# Altium PCB esp32c3phils.PcbDoc (part 2 of 2)
Units mil, origin at the board's own origin, x right, y up, seen from the top; angles counter-clockwise.
Board outline 2756.04 x 1955.51 mil, 2 copper layers (Top Layer, Bottom Layer), stack 37.8 mil thick; 62 components, 45 nets, 255 pads, 20 vias.
Unrouted connection lines stored in the file: 112.
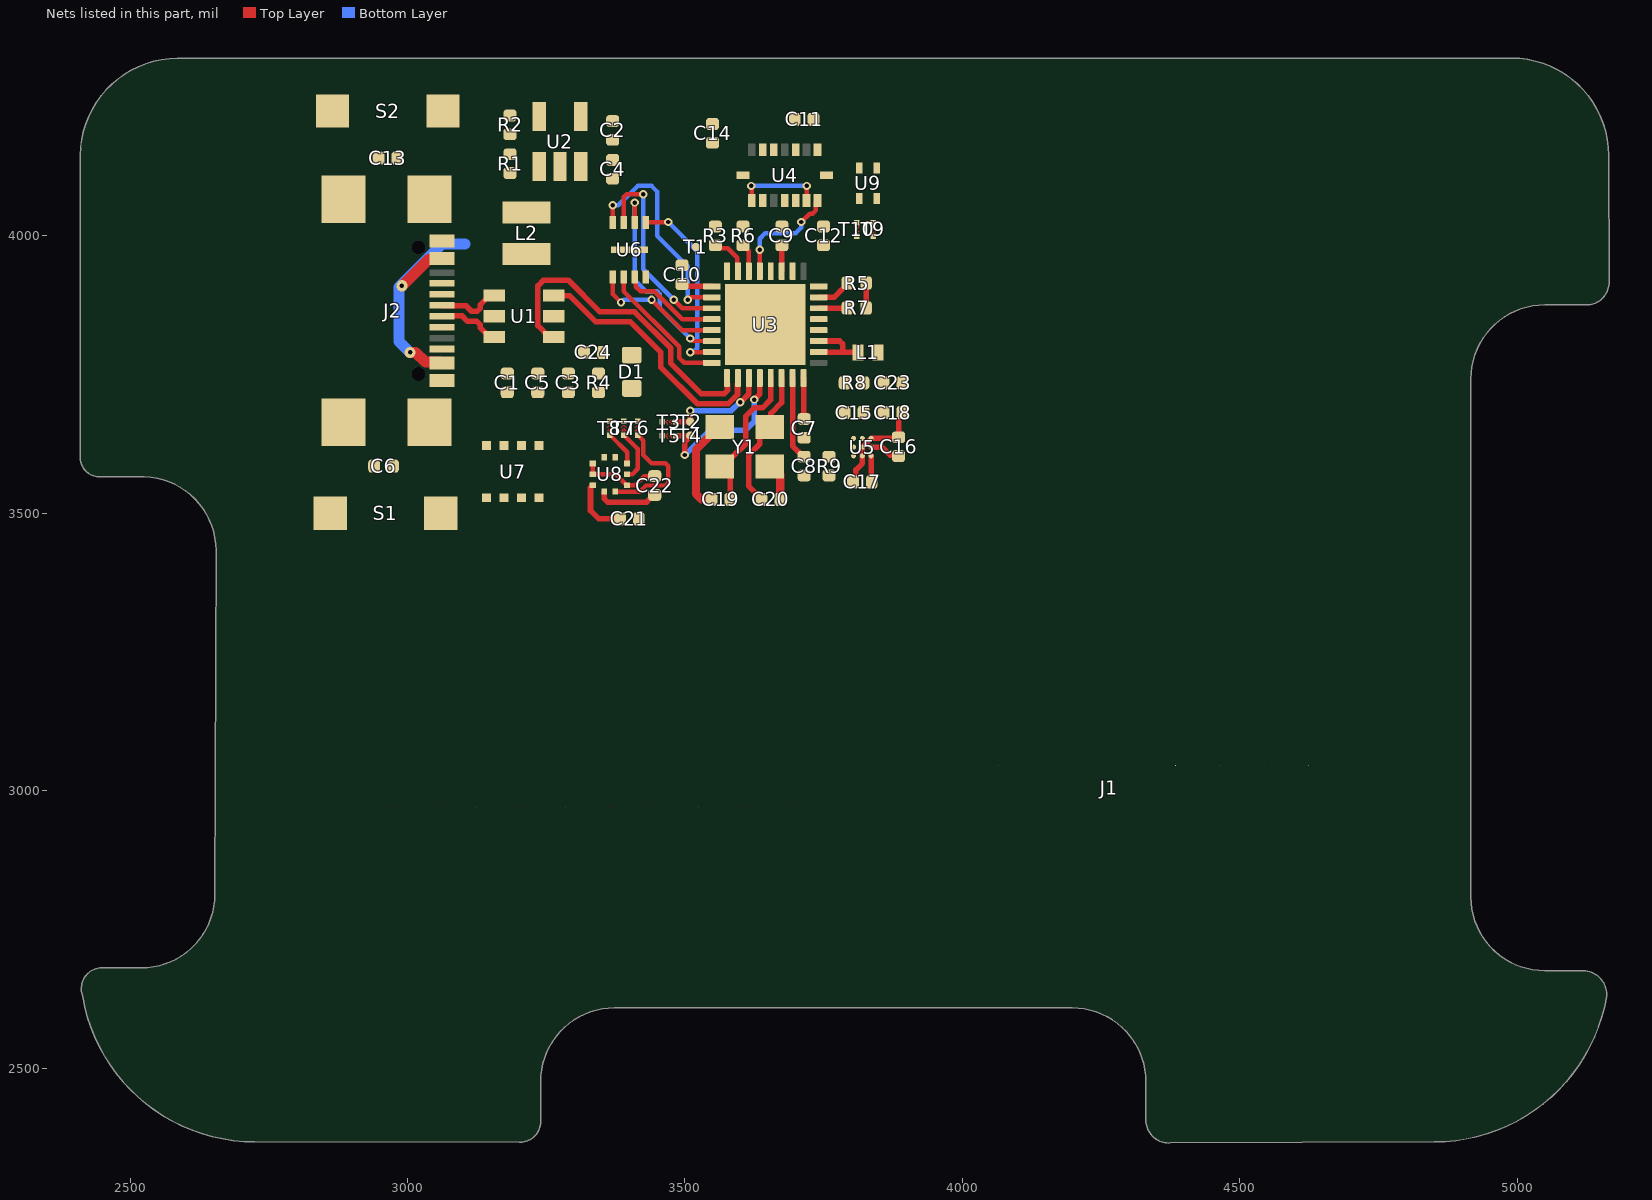
[diagram p2: the nets of this part, all layers, seen from the top]

## Part data
C1 C2 C4 C6 C7 C8 C9 C10 C11 C12 C13 C15 C17 C18 C21 C22: library part CC0402KRX7R7BB104, "Multilayer Ceramic Capacitor, 0.1 uF, 16 V, ï¿½ 10%, X7R, 0402 [1005 Metric]", Capacitance=100nF, Case Code (Imperial)=0402, Case Code (Metric)=1005, Dielectric=X7R, LCSC=C60474, Manufacturer=Yageo, Max Operating Temperature=125°C, Min Operating Temperature=-55°C, Package Quantity=1, Supplier Part Number 1=311-1338-1-ND, Temperature Coefficient=30ppm/°C, Tolerance=10%, Voltage=16V, Case/Package=0402, Category="Ceramic Capacitors", ComponentLink1Description=https://datasheet.ciiva.com/11788/0900766b80ce67ed-11788364.pdf?src-supplier=Rs, ComponentLink1URL=https://datasheet.ciiva.com/11788/0900766b80ce67ed-11788364.pdf?src-supplier=Rs, ComponentLink2Description=https://datasheet.ciiva.com/7978/1489800-7978111.pdf?src-supplier=Element14, ComponentLink2URL=https://datasheet.ciiva.com/7978/1489800-7978111.pdf?src-supplier=Element14, ComponentLink3Description=https://datasheet.ciiva.com/161/mlccorderingcode-161545.pdf?src-supplier=Digikey, ComponentLink3URL=https://datasheet.ciiva.com/161/mlccorderingcode-161545.pdf?src-supplier=Digikey, ComponentLink4Description=https://datasheet.ciiva.com/161/mlccorderingcode-161544.pdf?src-supplier=Digikey, ComponentLink4URL=https://datasheet.ciiva.com/161/mlccorderingcode-161544.pdf?src-supplier=Digikey, ComponentLink5Description=https://datasheet.ciiva.com/161/mlccorderingcode-161546.pdf?src-supplier=Digikey, ComponentLink5URL=https://datasheet.ciiva.com/161/mlccorderingcode-161546.pdf?src-supplier=Digikey, ComponentLink6Description=https://datasheet.ciiva.com/8033/1734573-8033661.pdf?src-supplier=Element14, ComponentLink6URL=https://datasheet.ciiva.com/8033/1734573-8033661.pdf?src-supplier=Element14, ComponentLink7Description=https://datasheet.ciiva.com/11587/upy-gphc-x7r-6-3v-to-50v-8-11587305.pdf?src-supplier=Avnet, ComponentLink7URL=https://datasheet.ciiva.com/11587/upy-gphc-x7r-6-3v-to-50v-8-11587305.pdf?src-supplier=Avnet, Depth=0.5mm, Halogen Free=5694HalogenFree, Height=0.5mm, Lead Free=5697LeadFree, Length=1mm, Manufacturer Part Number=CC0402KRX7R7BB104, Material=4241ConductorMaterial, Mount="Surface Mount", Number of Pins=2, Packaging="Tape and Reel", Pricing 1="1=0.1, 10=0.024, 50=0.0164, 100=0.0139, 500=0.0098, 1000=0.00852, 2500=0.00718, 5000=0.00636 (USD)", Radiation Hardening=No, Reach SVHC Compliant=No, RoHS=Yes, RoHS Compliant=Yes, Series=CC, Stock 1=15609894, Supplier 1=Digikey, Termination=SMD/SMT, Thickness=0.022inch, Voltage Rating=16V, Voltage Rating (AC)=16V, Voltage Rating (DC)=16V, Width=0.02inch
C3 C5 C23 C24: library part 0402ZD106MAT2A, "Multilayer Ceramic Chip Capacitor 0402 Size 10uF 10V X5R ±20% Tolerance SMD T/R", Capacitance=10uF, Case Code (Imperial)=0402, Case Code (Metric)=1005, Dielectric=X5R, Manufacturer="Kyocera AVX", Max Operating Temperature=85°C, Min Operating Temperature=-55°C, Supplier Part Number 1=478-KGM05CR51A106MHCT-ND, Tolerance=20%, Voltage Rating=10V, Case/Package=0402, Category="Ceramic Capacitors", ComponentLink1Description=http://catalogs.avx.com/SurfaceMount.pdf?src-supplier=Digikey, ComponentLink1URL=http://catalogs.avx.com/SurfaceMount.pdf?src-supplier=Digikey, ComponentLink2Description=http://datasheets.avx.com/cx5r.pdf?src-supplier=Digikey, ComponentLink2URL=http://datasheets.avx.com/cx5r.pdf?src-supplier=Digikey, ComponentLink3Description=https://datasheet.octopart.com/0402ZD106MAT2A-KYOCERA-AVX-datasheet-155912759.pdf?src-supplier=Future+Electronics, ComponentLink3URL=https://datasheet.octopart.com/0402ZD106MAT2A-KYOCERA-AVX-datasheet-155912759.pdf?src-supplier=Future+Electronics, ComponentLink4Description=https://www.farnell.com/datasheets/2260752.pdf?src-supplier=Newark, ComponentLink4URL=https://www.farnell.com/datasheets/2260752.pdf?src-supplier=Newark, ComponentLink5Description=https://datasheet.octopart.com/0402ZD106MAT2A-KYOCERA-AVX-datasheet-155912759.pdf?src-supplier=TME, ComponentLink5URL=https://datasheet.octopart.com/0402ZD106MAT2A-KYOCERA-AVX-datasheet-155912759.pdf?src-supplier=TME, Height=710um, Manufacturer Part Number=0402ZD106MAT2A, Material=4241ConductorMaterial, Mount="Surface Mount", Packaging="Cut Tape", Pricing 1="1=0.36, 10=0.212, 100=0.1271, 1000=0.0834, 2500=0.07583 (USD)", RoHS=Yes, RoHS Compliant=Yes, Series=-, Stock 1=61749, Supplier 1=Digikey, Voltage Rating (DC)=10V
C14: library part CL05A106MQ5NUNC, "Multilayer Ceramic Capacitor, 10 uF, 6.3 V, ï¿½ 20%, X5R, 0402 [1005 Metric]", Capacitance=10uF, Case Code (Imperial)=0402, Case Code (Metric)=1005, Dielectric=X5R, Manufacturer=Samsung, Max Operating Temperature=85°C, Min Operating Temperature=-55°C, Package Quantity=1, Tolerance=20%, Voltage Rating=6.3V, Case/Package=0402, Category="Ceramic Capacitors", ComponentLink1Description=https://datasheet.ciiva.com/16437/cl05a106mq5nunc-16437356.pdf?src-supplier=Future+Electronics, ComponentLink1URL=https://datasheet.ciiva.com/16437/cl05a106mq5nunc-16437356.pdf?src-supplier=Future+Electronics, ComponentLink2Description=https://datasheet.ciiva.com/26877/getdatasheetpartid-355289-26877841.pdf?src-supplier=Verical, ComponentLink2URL=https://datasheet.ciiva.com/26877/getdatasheetpartid-355289-26877841.pdf?src-supplier=Verical, Construction=Flat, Depth=0.5mm, Height=0.5mm, Length=1mm, Manufacturer Part Number=CL05A106MQ5NUNC, Mount="Surface Mount", Packaging="Tape and Reel", Pricing 1="10000=0.02499, 20000=0.02486, 40000=0.02474, 60000=0.02461, 80000=0.02448 (USD)", Radiation Hardening=No, RoHS=Yes, RoHS Compliant=Yes, Series=CL, Stock 1=540000, Supplier 1=Avnet, Supplier Part Number 1=CL05A106MQ5NUNC, Thickness=0.028inch, Width=0.02inch
C16: "Multilayer Ceramic Capacitor, 2.2 uF, 6.3 V, ï¿½ 20%, X5R, 0402 [1005 Metric]", Capacitance=2.2uF, Case Code (Imperial)=0402, Case Code (Metric)=1005, Dielectric=X5R, Manufacturer=Samsung, Manufacturer Part Number=CL05A225MQ5NNNC, Max Operating Temperature=85°C, Min Operating Temperature=-55°C, Supplier Part Number 1=1276-1469-1-ND, Tolerance=20%, Voltage Rating=6.3V, Case/Package=0402, Category="Ceramic Capacitors", ComponentLink1Description=https://datasheet.ciiva.com/25798/cl05a225mq5nnnc-25798545.pdf?src-supplier=Digikey, ComponentLink1URL=https://datasheet.ciiva.com/25798/cl05a225mq5nnnc-25798545.pdf?src-supplier=Digikey, ComponentLink2Description=https://datasheet.ciiva.com/16437/cl05a225mq5nnnc-16437362.pdf?src-supplier=Future+Electronics, ComponentLink2URL=https://datasheet.ciiva.com/16437/cl05a225mq5nnnc-16437362.pdf?src-supplier=Future+Electronics, Construction=Flat, Depth=0.5mm, Height=0.5mm, Length=1mm, Material=Ceramic, Mount="Surface Mount", Packaging="Tape and Reel", Pricing 1="1=0.08, 10=0.011, 100=0.0064, 1000=0.0048, 2500=0.0032 (USD)", Radiation Hardening=No, RoHS=Yes, RoHS Compliant=Yes, Series=CL, Stock 1=23507, Supplier 1=Digikey, Voltage Rating (DC)=6.3V
C19 C20: library part C10, "0402 10 pF 50 V ±5 % Tolerance NP0 SMT Multilayer Ceramic Capacitor", Capacitance=10pF, Case Code (Imperial)=0402, Case Code (Metric)=1005, Dielectric=C0G, Dielectric Material=4241ConductorMaterial, Insulation Resistance=100GR, Manufacturer=Yageo, Manufacturer Part Number=CC0402JRNPO9BN100, Max Operating Temperature=125°C, Min Operating Temperature=-55°C, Package Quantity=1, Supplier Part Number 1=311-1014-1-ND, Temperature Coefficient=30ppm/°C, Tolerance=5%, Voltage=50V, Case/Package=0402, Category="Ceramic Capacitors", ComponentLink1Description=https://datasheet.ciiva.com/11786/0900766b8079c870-11786158.pdf?src-supplier=Rs, ComponentLink1URL=https://datasheet.ciiva.com/11786/0900766b8079c870-11786158.pdf?src-supplier=Rs, ComponentLink2Description=https://datasheet.ciiva.com/143/mlccorderingcode-143992.pdf?src-supplier=Digikey, ComponentLink2URL=https://datasheet.ciiva.com/143/mlccorderingcode-143992.pdf?src-supplier=Digikey, ComponentLink3Description=https://datasheet.ciiva.com/143/mlccorderingcode-143993.pdf?src-supplier=Digikey, ComponentLink3URL=https://datasheet.ciiva.com/143/mlccorderingcode-143993.pdf?src-supplier=Digikey, ComponentLink4Description=https://datasheet.ciiva.com/143/mlccorderingcode-143994.pdf?src-supplier=Digikey, ComponentLink4URL=https://datasheet.ciiva.com/143/mlccorderingcode-143994.pdf?src-supplier=Digikey, ComponentLink5Description=https://datasheet.ciiva.com/8033/1443161-8033591.pdf?src-supplier=Element14, ComponentLink5URL=https://datasheet.ciiva.com/8033/1443161-8033591.pdf?src-supplier=Element14, ComponentLink6Description=https://datasheet.ciiva.com/8033/1443161-8033593.pdf?src-supplier=Element14, ComponentLink6URL=https://datasheet.ciiva.com/8033/1443161-8033593.pdf?src-supplier=Element14, ComponentLink7Description=https://datasheet.ciiva.com/8033/1443161-8033596.pdf?src-supplier=Element14, ComponentLink7URL=https://datasheet.ciiva.com/8033/1443161-8033596.pdf?src-supplier=Element14, ComponentLink8Description=https://datasheet.ciiva.com/28450/1443161-28450213.pdf?src-supplier=Element14, ComponentLink8URL=https://datasheet.ciiva.com/28450/1443161-28450213.pdf?src-supplier=Element14, ComponentLink9Description=https://datasheet.ciiva.com/5427/upy-gp-np0-16v-to-50v-8-5427741.pdf?src-supplier=Mouser, ComponentLink9URL=https://datasheet.ciiva.com/5427/upy-gp-np0-16v-to-50v-8-5427741.pdf?src-supplier=Mouser, Depth=0.5mm, Halogen Free=5694HalogenFree, Height=0.5mm, Lead Free="Lead Free", Length=1mm, Mount="Surface Mount", Number of Pins=2, Packaging="Tape and Reel", Pricing 1="1=0.1, 10=0.024, 100=0.0133, 1000=0.00812, 2500=0.00685, 5000=0.00609 (USD)", Radiation Hardening=No, Reach SVHC Compliant=No, RoHS=Yes, RoHS Compliant=Yes, Series=CC, Stock 1=1109319, Supplier 1=Digikey, Termination=SMD/SMT, Thickness=0.022inch, Voltage Rating=50V, Voltage Rating (AC)=50V, Voltage Rating (DC)=50V, Width=0.02inch
D1: library part LED, "SMD LED Yellow-White", Package=None, Availability=Unavailable, MF=Chengguangxing, MP=ADL-0603W, Price=None, SnapEDA_Link=https://www.snapeda.com/parts/ADL-0603W/Chengguangxing/view-part/106378/?ref=snap
J1 J3: Package=None, Availability=Unavailable, MF="{'manufacturer': u'Adam Tech'}", MP=PH2-20-UA, Price=None
J2: library part USB4110-GF-A, "USB Connector, 16 Contact(s), Male, Right Angle, Surface Mount Terminal, Locking, Receptacle", Manufacturer="Global Connector Technology", Supplier Part Number 1=2073-USB4110-GF-A-1-ND, Voltage Rating=20V, Category="USB Connectors", ComponentLink1Description=https://gct.co/files/drawings/usb4110.pdf?src-supplier=Digikey, ComponentLink1URL=https://gct.co/files/drawings/usb4110.pdf?src-supplier=Digikey, Contact Material=153,157ConductorMaterial, Height=3.46mm, LCSC=USB4110-GF-A, Manufacturer Part Number=USB4110-GF-A, Number of Contacts=16NUMBER, Number of Pins=16NUMBER, Orientation=5496OrientationType, Pricing 1="1=1.64, 10=1.244, 25=1.1176, 50=1.032, 100=0.9547, 250=0.86368, 500=0.80254 (USD)", RoHS=No, Stock 1=30215, Supplier 1=Digikey, USB Standard=6108USBStandard
L1: "Inductor with Inductance: 2.2nH Tol. +/-0.1nH, Package: 0402 (1005)", Package="1006 Murata", Availability=Good, Check_prices=https://www.snapeda.com/parts/LQW15AN2N2B80D/Murata%20Electronics%20North%20America/view-part/1522880/?ref=eda, MF="Murata Electronics", MP=LQW15AN2N2B80D, Price=None, Purchase-URL=https://pricing.snapeda.com/search/part/LQW15AN2N2B80D/?ref=eda, SnapEDA_Link=https://www.snapeda.com/parts/LQW15AN2N2B80D/Murata%20Electronics%20North%20America/view-part/1522880/?ref=snap
L2: "Fixed Ind 2.220%UH 0.114 Ohm 1800", Manufacturer=Sunlord, Supplier Part Number 1=3442-SPH252010H2R2MTCT-ND, Category="Fixed Inductors", Manufacturer Part Number=SPH252010H2R2MT, Pricing 1="1=0.27, 10=0.207, 25=0.1872, 50=0.1736, 100=0.1609, 250=0.14548, 500=0.13478, 1000=0.125 (USD)", RoHS=Yes, RoHS Compliant=Yes, Stock 1=1953, Supplier 1=Digikey
R1 R2 R3 R5 R6 R7 R8 R9: library part RC0402FR-075K1L, "SMD Chip Resistor, 5.1 kOhm, ï¿½ 1%, 62.5 mW, 0402 [1005 Metric], Thick Film, General Purpose", Case Code (Imperial)=0402, Case Code (Metric)=1005, LCSC=C105872, Manufacturer=Yageo, Max Operating Temperature=155°C, Max Power Dissipation=63mW, Min Operating Temperature=-55°C, Package Quantity=1, Resistance=5.1kR, Resistance Tolerance=1%, Resistor Type="Thick Film", Supplier Part Number 1=311-5.10KLRCT-ND, Temperature Coefficient=100ppm/°C, Voltage Rating=50V, Case/Package=0402, Category="Chip SMD Resistors", Construction=Rectangular, Depth=0.5mm, Features="Moisture Resistant", Height=0.016inch, Lead Free=5697LeadFree, Length=1mm, Manufacturer Part Number=RC0402FR-075K1L, Military Standard=Not, Number of Terminations=2, Packaging="Tape and Reel", Power Rating=63mW, Pricing 1="1=0.1, 10=0.009, 50=0.0072, 100=0.0041, 500=0.00306 (USD)", Reach SVHC Compliant=Unknown, RoHS=Yes, RoHS Compliant=Yes, Series=RC, Stock 1=868211, Supplier 1=Digikey, Technology="THICK FILM", Termination=SMD/SMT, Tolerance=1%, Voltage Rating (DC)=50V, Width=0.02inch, Working Voltage=50V
R4: library part 2K2, "Res Thin Film 0402 2K Ohm 0.1% 0.063W ±25ppm/°C Molded SMD Punched Carrier T/R", Case Code (Imperial)=0402, Case Code (Metric)=1005, Manufacturer=Panasonic, Max Operating Temperature=155°C, Max Power Dissipation=63mW, Min Operating Temperature=-55°C, Package Quantity=1, Resistance=2kR, Resistance Tolerance=0.1%, Resistor Type="Thin Film,Metal Film", Supplier Part Number 1=P2.0KDCCT-ND, Temperature Coefficient=25ppm/°C, Voltage Rating=25V, Case/Package=0402, Category="Chip SMD Resistors", ComponentLink1Description=https://datasheet.ciiva.com/43470/1776116-43470486.pdf?src-supplier=Farnell, ComponentLink1URL=https://datasheet.ciiva.com/43470/1776116-43470486.pdf?src-supplier=Farnell, ComponentLink2Description=https://datasheet.ciiva.com/9116/aoa0000ce26-9116653.pdf?src-supplier=Avnet, ComponentLink2URL=https://datasheet.ciiva.com/9116/aoa0000ce26-9116653.pdf?src-supplier=Avnet, ComponentLink3Description=https://datasheet.ciiva.com/9197/aoa0000ce26-9197535.pdf?src-supplier=Avnet, ComponentLink3URL=https://datasheet.ciiva.com/9197/aoa0000ce26-9197535.pdf?src-supplier=Avnet, Contact Plating=Tin, Depth=0.5mm, Features="Automotive AEC-Q200", Height=0.35mm, Lead Free="Lead Free", Length=1mm, Manufacturer Part Number=ERA-2AEB202X, Mount="Surface Mount", Number of Terminations=2, Packaging="Tape and Reel", Power Rating=63mW, Pricing 1="1=0.1, 10=0.082, 50=0.0716, 100=0.0677, 500=0.05944, 1000=0.05637, 5000=0.05032 (USD)", Radiation Hardening=No, Reach SVHC Compliant=No, RoHS=Yes, RoHS Compliant=Yes, Series=ERA-2A, Size Code=0402, Stock 1=90625, Supplier 1=Digikey, Technology="THIN FILM", Termination=SMD/SMT, Tolerance=0.1%, Width=0.5mm
S1 S2: "Switch Tactile N.O. SPST Round Button Gull Wing 0.05A 12VDC 0.98N SMD T/R", Manufacturer="Alps Electric", Manufacturer Part Number=SKRKAHE020, Supplier Part Number 1=4809-SKRKAHE020CT-ND, Category="Tactile Switches", ComponentLink1Description=http://datasheet.octopart.com/SKRKAHE020-ALPS-datasheet-41327033.pdf?src-supplier=Farnell, ComponentLink1URL=http://datasheet.octopart.com/SKRKAHE020-ALPS-datasheet-41327033.pdf?src-supplier=Farnell, ComponentLink2Description=http://datasheet.octopart.com/SKRKAHE020-ALPS-datasheet-41327033.pdf?src-supplier=Avnet, ComponentLink2URL=http://datasheet.octopart.com/SKRKAHE020-ALPS-datasheet-41327033.pdf?src-supplier=Avnet, ComponentLink3Description=http://datasheet.octopart.com/SKRKAHE020-ALPS-datasheet-41327033.pdf?src-supplier=Onlinecomponents.com, ComponentLink3URL=http://datasheet.octopart.com/SKRKAHE020-ALPS-datasheet-41327033.pdf?src-supplier=Onlinecomponents.com, ComponentLink4Description=http://datasheet.octopart.com/SKRKAHE020-ALPS-datasheet-41327033.pdf?src-supplier=Verical, ComponentLink4URL=http://datasheet.octopart.com/SKRKAHE020-ALPS-datasheet-41327033.pdf?src-supplier=Verical, ComponentLink5Description=http://datasheet.octopart.com/SKRKAHE020-ALPS-datasheet-41327033.pdf?src-supplier=Future+Electronics, ComponentLink5URL=http://datasheet.octopart.com/SKRKAHE020-ALPS-datasheet-41327033.pdf?src-supplier=Future+Electronics, ComponentLink6Description=https://datasheet.octopart.com/SKRKAHE020-ALPS-datasheet-156009340.pdf?src-supplier=Electro+Sonic, ComponentLink6URL=https://datasheet.octopart.com/SKRKAHE020-ALPS-datasheet-156009340.pdf?src-supplier=Electro+Sonic, ComponentLink7Description=http://datasheet.octopart.com/SKRKAHE020-ALPS-datasheet-41327033.pdf?src-supplier=Quest, ComponentLink7URL=http://datasheet.octopart.com/SKRKAHE020-ALPS-datasheet-41327033.pdf?src-supplier=Quest, ComponentLink8Description=https://datasheet.octopart.com/SKRKAHE020-ALPS-datasheet-41327033.pdf?src-supplier=Master+Electronics, ComponentLink8URL=https://datasheet.octopart.com/SKRKAHE020-ALPS-datasheet-41327033.pdf?src-supplier=Master+Electronics, Pricing 1="1=0.41, 10=0.351, 25=0.3276, 100=0.2931, 250=0.27156, 500=0.2563, 1000=0.24208 (USD)", RoHS=Yes, RoHS Compliant=Yes, Stock 1=19659, Supplier 1=Digikey
U1: library part USBLC6-2SC6, "ESD Suppressor Diode Array Dual Uni-Dir 15kV Air Gap/15kV Contact Disc 6-Pin SOT-23 T/R", Breakdown Voltage=6V, Capacitance=3.5pF, Case/Package=SOT-23, Clamping Voltage=17V, LCSC=C5250994, Leakage Current=150nA, Manufacturer=STMicroelectronics, Max Operating Temperature=125°C, Max Repetitive Reverse Voltage (Vrrm)=5.25V, Min Operating Temperature=-40°C, Operating Supply Voltage=1.1V, Package Quantity=3000, Peak Pulse Current=5A, Power Line Protection=Yes, Supplier Part Number 1=497-5235-1-ND, Test Current=1mA, Working Voltage=5V, Category="TVS Diodes", Clamping Voltage-Max=17V, ComponentLink1Description=https://datasheet.ciiva.com/1268/1690354-1268384.pdf?src-supplier=Element14, ComponentLink1URL=https://datasheet.ciiva.com/1268/1690354-1268384.pdf?src-supplier=Element14, ComponentLink2Description=https://datasheet.ciiva.com/4508/cd00050750-113117-4508433.pdf?src-supplier=Mouser, ComponentLink2URL=https://datasheet.ciiva.com/4508/cd00050750-113117-4508433.pdf?src-supplier=Mouser, ComponentLink3Description=https://datasheet.ciiva.com/41444/001184109-da-01-en-ic-esd-protecti-usblc6-2sc6-sot-23-6-stm-41444156.pdf?src-supplier=Conrad, ComponentLink3URL=https://datasheet.ciiva.com/41444/001184109-da-01-en-ic-esd-protecti-usblc6-2sc6-sot-23-6-stm-41444156.pdf?src-supplier=Conrad, Data Rate=480Mbps, Depth=1.75mm, Direction=Unidirectional,Bidirectional, ESD Protection=Yes, Height=1.3mm, Lead Free="Lead Free", Length=3.05mm, Manufacturer Part Number=USBLC6-2SC6, Max Breakdown Voltage=6V, Max Reverse Leakage Current=150nA, Min Breakdown Voltage=6V, Mount="Surface Mount", Number of Bidirectional Channels=2, Number of Channels=2, Number of Elements=1, Number of Pins=6, Packaging="Tape and Reel", Polarity=Unidirectional,Bidirectional, Pricing 1="1=0.36, 10=0.243, 100=0.163, 500=0.127, 1000=0.114, 3000=0.09, 6000=0.084, 9000=0.078, 15000=0.077, 21000=0.0755, 30000=0.075 (USD)", Radiation Hardening=No, Reach SVHC Compliant=No, Reverse Breakdown Voltage=6V, Reverse Standoff Voltage=5.25V, RoHS=Yes, RoHS Compliant=Yes, Series=USB, Stock 1=85420, Supplier 1=Digikey, Termination=SMD/SMT, Width=1.75mm
U2: "Linear Voltage Regulator IC Positive Fixed 1 Output 500mA SOT-23-5", Package="SOT-23-5 Exar", Check_prices=https://www.snapeda.com/parts/SPX3819M5-L-3-3/TR/MaxLinear%252C+Inc./view-part/?ref=eda, MF="MaxLinear, Inc.", MP=SPX3819M5-L-3-3/TR, SnapEDA_Link=https://www.snapeda.com/parts/SPX3819M5-L-3-3/TR/MaxLinear%252C+Inc./view-part/?ref=snap
U3: "WiFi Modules (802.11) (Engineering Samples Only) SMD IC ESP32-C3, RISC-V single-core MCU, 2.4G Wi-Fi & BLE 5.0 combo, QFN 32-pin, 5*5 mm, 40 ~ 105C", Package="VFQFN-32 Espressif Systems", Check_prices=https://www.snapeda.com/parts/ESP32-C3/Espressif+Systems/view-part/?ref=eda, MF="Espressif Systems", MP=ESP32-C3, SnapEDA_Link=https://www.snapeda.com/parts/ESP32-C3/Espressif+Systems/view-part/?ref=snap
U4: "High-performance 6-axis inertial sensor (accelerometer + gyroscope) <a href=\"https://pricing.snapeda.com/parts/BMI088/Bosch%20Sensortec/view-part?ref=eda\">Check prices</a>", Package=None, Availability=Unavailable, MP=BMI088, Price=None
U5 U8: "No Description Available", Mfr_Name="Bosch Sensortec", RefDes=RefDes
  U5: Type="Magnetic Sensors"
  U8: Type=Type
U6: "NOR Flash Serial (SPI, Dual SPI, Quad SPI) 3V/3.3V 16M-bit 2M x 8 6ns 8-Pin USON EP T/R", Package="UFDFN-8 Winbond", Availability="In Stock", Check_prices=https://www.snapeda.com/parts/W25Q16JVUXIQ%20TR/Winbond/view-part/?ref=eda, MF=Winbond, MP="W25Q16JVUXIQ TR", Price=None, Purchase-URL="https://pricing.snapeda.com/search/part/W25Q16JVUXIQ TR/?ref=eda", SnapEDA_Link=https://www.snapeda.com/parts/W25Q16JVUXIQ%20TR/Winbond/view-part/?ref=snap
U7: "Gas sensor measuring relative humidity, barometric pressure, ambient temperature and gas (VOC)", Package=None, Availability=Unavailable, MP=BME688, Price=None
U9: "Digital Relative Humidity Temperature Sensor, Â±1.0 %RH, Â±0.1 Â°C, Ultra-Low-Power, with filtermembrane", Package=Package, Availability="In Stock", Check_prices=https://www.snapeda.com/parts/SHT45-AD1B-R3/Sensirion/view-part/?ref=eda, MF=Sensirion, MP=SHT45-AD1B-R3, Price=None, Purchase-URL=https://pricing.snapeda.com/search/part/SHT45-AD1B-R3/?ref=eda, SnapEDA_Link=https://www.snapeda.com/parts/SHT45-AD1B-R3/Sensirion/view-part/?ref=snap
Y1: library part ECS-400-18-33-JGN-TR3, Package=None, Availability=Unavailable, MF="{'manufacturer': u'ECS Inc.'}", MP=ECS-400-18-33-JGN-TR3, Price=None

## Via types
v1: diameter 15, hole 8, Top Layer to Bottom Layer, 18 vias
v2: diameter 20, hole 8, Top Layer to Bottom Layer, 2 vias

## Nets (pads, with @x,y where several pads share a name; then routed paths per layer and width w, separated by ;. In a path a pad name is that pad's centre, name@x,y a point inside that pad or via, vN(x,y) a via of type N, cw(c..) or ccw(c..) an arc to the next point about the centre after c; other vN are vias at no path point)
+3V3: C5.1 C7.2 C8.2 C9.2 C10.2 C15.1 C17.1 C18.1 C24.1 D1.1 L1.2 R3.1 R5.1 R6.1 R7.1 R8.1 R9.1 U2.5 U3.11 U3.17 U3.31 U3.32 U5.B3 U5.C1 U7.6 U7.8 U9.3 | length 419.9
  Top Layer w10: C10.2@3495,3913.07 3498.86,3909.21 3548.43,3909.21 U3.17@3548.74,3908.9 ; U3.11@3674.53,3936.26 3674.76,3936.5 3674.76,3982.83 C9.2@3675,3983.07 ; U3.31@3694.21,3743.74 3694.21,3621.54 3713.82,3601.93 C8.2@3715,3601.93 ; U3.32@3713.9,3743.74 3714.21,3743.43 3714.21,3670.79 C7.2@3715,3670 ; R7.1@3826.93,3870 R5.1@3826.93,3915 ; C17.1@3835.75,3556.38 U5.C1@3835.75,3603.5
ACC_INT: U3.10 U4.16
BOOT_GYR_INT: C6.1 R3.2 S1.1 T1.1 U3.15 U4.12 | length 73.6
  Top Layer w8: R3.2@3555,3983.07 3560.62,3977.45 3577.55,3977.45 3594.47,3960.53 3594.47,3937.57 U3.15@3595.79,3936.26
CC1: J2.A5 R2.1
CC2: J2.B5 R1.1
CHIP_EN: C13.1 R5.2 S2.1 U3.7 | length 63.6
  Top Layer w10: U3.7@3741.26,3889.21 3769.21,3889.21 3779.47,3899.47 3779.47,3899.88 3793.07,3913.48 R5.2@3793.07,3915
FSPICLK: T6.2 U3.12 U4.8 U7.4
FSPID: T7.2 U3.13 U4.9 U7.3 | length 205.7
  Top Layer w8: v1(3635,3975) 3635.16,3974.84 U3.13@3635.16,3936.26 ; v1(3710,4025) 3725,4040 3730.31,4040 3736.17,4045.85 3736.17,4060.58 U4.9@3739.06,4063.47
  Bottom Layer w8: v1(3635,3975) 3635,3995 3645,4005 3700,4005 3710,4015 v1(3710,4025)
FSPINCS1: U3.16 U4.14
FSPINCS2: R6.2 U3.14 U4.5 | length 51.3
  Top Layer w8: R6.2@3605,3983.07 3605.3,3983.07 3615.47,3972.9 U3.14@3615.47,3936.26
FSPINCS3: T3.2 U7.2
FSPINCS4: T5.2 U8.6
FSPIQ: R7.2 T8.2 U3.6 U4.10 U4.15 U7.5 | length 205.7
  Top Layer w8: v1(3620,4090) 3620.47,4089.53 3620.47,4063.95 U4.15@3620.94,4063.47 ; U4.10@3719.37,4063.47 3719.69,4063.79 3719.69,4089.69 v1(3720,4090)
  Top Layer w10: U3.6@3741.26,3869.53 3741.5,3869.76 3792.83,3869.76 R7.2@3793.07,3870
  Bottom Layer w8: v1(3620,4090) v1(3720,4090)
GND: C1.2 C2.2 C3.2 C4.2 C5.2 C6.2 C7.1 C8.1 C9.1 C10.1 C11.1 C12.1 C13.2 C14.2 C15.2 C16.1 C17.2 C18.2 C19.2 C20.2 C21.1 C22.2 C23.2 C24.2 J1.7 J2.A1/B12 J2.B1/A12 J2.S1 J2.S2 J2.S3 J2.S4 R1.2 R2.2 R4.2 S1.2 S2.2 U1.2 U2.2 U3.33 U4.2 U4.7 U5.B1 U5.B2 U5.C3 U6.4 U6.9 U7.1 U7.7 U8.3 U8.8 U8.9 U9.4 Y1.2 Y1.4 | length 560.9
  Top Layer w8: U8.8@3334,3589.68 U8.9@3334,3570 3375.82,3570 3395.5,3550.32 3410.32,3550.32 3426.63,3566.63 3445.45,3566.63 C22.2@3445.75,3566.93
  Top Layer w10: C17.2@3803.07,3554 3808.31,3559.23 3808.31,3578.31 3820,3590 U5.B1@3820,3603.5 U5.B2@3820,3619.25 U5.C3@3835.75,3635 3883.32,3635 C16.1@3885.25,3636.93 3885.25,3665.15
  Top Layer w15: C19.2@3548.07,3525 3530,3525 3520,3535 3520,3614.65 3560.79,3655.43 Y1.4@3564.72,3655.43 ; Y1.2@3655.28,3584.57 3657.78,3584.57 3671.93,3570.41 C20.2@3671.93,3525
INT_1: U5.A1
INT_BMP390: U3.8 U8.7
NetC4_1: C4.1 U2.4
NetC11_2: C11.2 C12.2 U4.3 U4.11
NetC14_1: C14.1 U3.18 U6.8 | length 392.9
  Top Layer w8: v1(3370,4055) 3370.24,4054.76 3370.24,4024.45 U6.8@3370.47,4024.21 ; v1(3505,3885) 3509.21,3889.21 U3.18@3548.74,3889.21
  Bottom Layer w8: v1(3370,4055) 3380,4055 3415,4090 3440,4090 3450,4080 3450,4000 3505,3945 v1(3505,3885)
NetC16_2: C16.2 U5.C2 | length 56.2
  Top Layer w10: U5.C2@3835.75,3619.25 3855.75,3619.25 3870,3605 3883.32,3605 C16.2@3885.25,3603.07
NetC21_2: C21.2 C22.1 U8.1 U8.10 | length 218.1
  Top Layer w10: U8.10@3334,3550.32 3333.5,3550.32 3333.5,3549.82 3330,3546.32 3330,3505 3345,3490 C21.2@3383.07,3490 ; U8.1@3355.16,3539 3355.16,3525.86 3361.02,3520 3431.16,3520 3444.23,3533.07 C22.1@3445.75,3533.07
NetC23_1: C23.1 L1.1 U3.2 U3.3 | length 131.3
  Top Layer w10: U3.2@3741.26,3790.79 3741.57,3790.47 3785,3790.47 ; U3.3@3741.26,3810.47 3779.14,3810.47 3785,3804.61 3785,3790.47 ; L1.1@3811.89,3790 3811.42,3790.47 3785,3790.47
NetD1_2: D1.2 R4.1
NetT2_1: T2.1 T3.1 U3.27 | length 192.4
  Top Layer w10: T3.1@3484,3665 T2.1@3510,3665 v1(3510,3685) ; v1(3600,3700) 3615.47,3715.47 U3.27@3615.47,3743.74
  Bottom Layer w10: v1(3510,3685) 3583.65,3685 3598.65,3700 v1(3600,3700)
NetT4_1: T4.1 T5.1 U3.28 | length 297.9
  Top Layer w10: T5.1@3484,3640 T4.1@3510,3640 3510,3638.65 3500,3628.65 v1(3500,3605) ; v1(3625,3705) 3635.16,3715.16 U3.28@3635.16,3743.74
  Bottom Layer w10: v1(3500,3605) 3545,3650 3610,3650 3625,3665 v1(3625,3705)
NetT6_1: T6.1 U8.2 | length 225.2
  Top Layer w8: U8.2@3374.84,3539 3419,3539 3430,3550 3465,3550 3470,3555 3470,3585 3465,3590 3440,3590 3425,3605 3425,3631 T6.1@3415,3641
NetT7_1: T7.1 U8.4 | length 94.5
  Top Layer w8: T7.1@3390,3641 3415,3616 3415,3580 3405,3570 U8.4@3396,3570
NetT8_1: T8.1 U8.5 | length 64.2
  Top Layer w8: T8.1@3365,3641 3396,3610 U8.5@3396,3589.68
NetT9_1: T9.1 U9.2
NetT10_1: T10.1 U9.1
NetU3_19: U3.19 U6.7 | length 370.7
  Top Layer w8: U6.7@3390.16,4024.21 3390.16,4070.16 3395,4075 v1(3425,4075) ; v1(3480,3885) 3495.47,3869.53 U3.19@3548.74,3869.53
  Bottom Layer w8: v1(3425,4075) 3425,3940 v1(3480,3885)
NetU3_20: U3.20 U6.3 | length 179.5
  Top Layer w8: U6.3@3409.84,3925.79 3411.75,3923.88 3411.75,3908.25 3420,3900 3445,3900 3495.16,3849.84 U3.20@3548.74,3849.84
NetU3_21: U3.21 U6.1 | length 240.3
  Top Layer w8: U6.1@3370.47,3925.79 3370.47,3894.53 v1(3385,3880) ; v1(3440,3885) 3494.84,3830.16 U3.21@3548.74,3830.16
  Bottom Layer w8: v1(3385,3880) 3390,3885 v1(3440,3885)
NetU3_22: U3.22 U6.6 | length 374.8
  Top Layer w8: U6.6@3409.84,4024.21 3409.92,4024.29 3409.92,4059.92 v1(3410,4060) ; v1(3510,3815) 3514.53,3810.47 U3.22@3548.74,3810.47
  Bottom Layer w8: v1(3410,4060) 3410,3920 3430,3900 3450.31,3900 3455,3895.31 3455,3870 v1(3510,3815)
NetU3_23: U3.23 U6.5 | length 344.7
  Top Layer w8: U6.5@3429.53,4024.21 3429.92,4024.61 3469.61,4024.61 v1(3470,4025) ; v1(3510,3790) 3510.39,3790.39 3548.35,3790.39 U3.23@3548.74,3790.79
  Bottom Layer w8: v1(3470,4025) 3522.5,3972.5 3522.5,3797.5 3515,3790 v1(3510,3790)
NetU3_24: U3.24 U6.2 | length 249.6
  Top Layer w8: U6.2@3390.16,3925.79 3390.16,3899.84 3490,3800 3490,3780 3498.9,3771.1 U3.24@3548.74,3771.1
SCL: R9.2 T9.2 U3.4 U5.A3
SDA: R8.2 T10.2 U3.5 U5.A2
USB1_N: J2.A7 J2.B7 U1.1 U1.6 U3.25 | length 694.4
  Top Layer w10: J2.A7@3062.32,3855.16 3063.17,3856 3098.51,3856 3108.51,3846 3125.14,3846 3131,3840.14 3131,3834.6 3148,3817.6 U1.6@3156.25,3817.6 ; U1.1@3263.75,3817.6 3255.5,3817.6 3235,3838.1 3235,3910 3245,3920 3290,3920 3347,3863 3409.46,3863 3475,3797.46 3475,3770 3529.37,3715.63 3571.09,3715.63 3576.94,3721.49 3576.94,3732.27 3576.1,3733.11 U3.25@3576.1,3743.74
USB1_P: J2.A6 J2.B6 U1.3 U1.4 U3.26 | length 578.3
  Top Layer w10: J2.A6@3062.32,3874.84 3063.17,3874 3105.96,3874 3115.96,3864 3125.65,3864 3131.51,3869.86 3131.51,3875.91 3148,3892.4 U1.4@3156.25,3892.4 ; U1.3@3263.75,3892.4 3263.88,3892.27 3292.27,3892.27 3339.54,3845 3402,3845 3457,3790 3457,3763 3522.37,3697.63 3578.54,3697.63 3594.94,3714.04 3594.94,3732.27 3595.79,3733.11 U3.26@3595.79,3743.74
VBUS_FILTER: C2.1 C3.1 L2.1 U2.1 U2.3
VCC_5VMECHA: J1.10
VCC_VBUS: C1.1 J2.A4/B9 J2.B4/A9 L2.2 U1.5 | length 438
  Top Layer w20: v2(2990,3910) 3037.68,3957.68 3060.51,3957.68 J2.A4/B9@3062.32,3959.49 ; v2(3005,3790) 3014.87,3790 3032.55,3772.32 3060.51,3772.32 J2.B4/A9@3062.32,3770.51
  Top Layer w30: L2.2@3212.42,3965 L2.2@3215,3967.58
  Bottom Layer w20: v2(3005,3790) 2985,3810 2985,3907.5 3062.5,3985 3103.28,3985
XTAL_N: C19.1 U3.29 Y1.1 | length 274.6
  Top Layer w10: Y1.1@3564.72,3584.57 Y1.1@3565.28,3584.57 ; C19.1@3581.93,3525 3581.93,3567.91 Y1.1@3565.28,3584.57 ; U3.29@3654.84,3743.74 3654.84,3704.84 3640,3690 3625,3690 3610,3675 3610,3625 3600.36,3615.36 3599.46,3615.36 3568.66,3584.57 Y1.1@3565.28,3584.57
XTAL_P: C20.1 U3.30 Y1.3 | length 255.3
  Top Layer w10: C20.1@3638.07,3525 3638.07,3526.18 3615,3549.25 3615,3605 3635,3625 3635,3638.78 3651.65,3655.43 3655.28,3655.43 3655,3655.71 3655,3680 3674.53,3699.53 U3.30@3674.53,3743.74
pads on no net: J1.1 J1.2 J1.3 J1.4 J1.5 J1.6 J1.8 J1.9 J1.11 J1.12 J1.13 J1.14 J1.15 J1.16 J1.17 J1.18 J1.19 J1.20 J2. J2.A8 J2.B8 J3.1 J3.2 J3.3 J3.4 J3.5 J3.6 J3.7 J3.8 J3.9 J3.10 J3.11 J3.12 J3.13 J3.14 J3.15 J3.16 J3.17 J3.18 J3.19 J3.20 U3.1 U3.9 U4.1 U4.4 U4.6 U4.13

## Keep-outs
Keep-Out Layer:
  lines w10: 2415,3600.45 2414.99,4145.2 cw(c2592.5,4142.95) 2590,4320.45 4995,4320.45 cw(c4995,4145.45) 5170,4145.45 5171.03,3916.49 cw(c5130,3916.49) 5130,3875.45 5055,3875.45 ccw(c5055,3742.38) 4921.93,3742.38 4921.93,2808.52 ccw(c5055,2808.52) 5055,2675.45 5125.86,2675.45 ; 2415.05,3601.43 ccw(c2451.02,3601.43) 2451.02,3565.45 ; 2419.44,2629.4 ccw(c2730,2681.87) 2730,2366.91 3206.38,2366.6 ; 2419.64,2629.47 cw(c2455,2642.97) 2460,2680.49 2525,2680.45 ccw(c2525,2813.52) 2658.07,2813.53 2660,3435.45 ; 2451.2,3565.45 2530,3565.45 ; 2531.01,3565.42 cw(c2527.5,3432.97) 2660,3432.97 ; 3209.03,2366.61 ccw(c3209.03,2402.59) 3245.01,2402.59 3245,2475.41 cw(c3378.07,2475.41) 3378.07,2608.48 ; 3376.3,2608.48 4203.07,2608.48 cw(c4203.08,2475.41) 4336.15,2475.41 ; 4336.07,2405.98 ccw(c4377.11,2405.98) 4377.11,2364.95 ; 4336.1,2405.95 4336.1,2475.45 ; 4379.61,2365 4855.98,2366.91 ccw(c4855.98,2681.87) 5166.53,2629.35 ccw(c5123.26,2632.4) 5125.24,2675.73 ; 2410,4145.2 cw(c2587.5,4142.95) 2585,4320.45 ; 2410,4145.2 cw(c2587.5,4142.95) 2585,4320.45 ; 2409.99,4145.2 2410,3600.45 2409.99,4145.2 ; 2455,2680.49 ccw(c2450,2642.97) 2414.64,2629.47 cw(c2450,2642.97) 2455,2680.49 ; 2455,2680.49 2520,2680.45 ; 2455,2680.49 2520,2680.45 ; 2520,2680.45 ccw(c2520,2813.52) 2653.07,2813.53 ; 2520,2680.45 ccw(c2520,2813.52) 2653.07,2813.53 ; 2585,4320.45 4990,4320.45 ; 2585,4320.45 4990,4320.45 ; 2653.07,2813.53 2655,3435.45 2653.07,2813.53 ; 2725,2366.91 cw(c2725,2681.87) 2414.44,2629.4 ccw(c2725,2681.87) 2725,2366.91 ; 2725,2366.91 3201.38,2366.6 2725,2366.91 ; 3240.01,2402.59 cw(c3204.03,2402.59) 3204.03,2366.61 ccw(c3204.03,2402.59) 3240.01,2402.59 ; 3240.01,2402.59 3240,2475.41 ; 3240.01,2402.59 3240,2475.41 ; 3240,2475.41 cw(c3373.07,2475.41) 3373.07,2608.48 ccw(c3373.07,2475.41) 3240,2475.41 ; 4198.07,2608.48 cw(c4198.08,2475.41) 4331.15,2475.41 ccw(c4198.08,2475.41) 4198.07,2608.48 ; 4198.07,2608.48 3371.3,2608.48 4198.07,2608.48 ; 4850.98,2366.91 ccw(c4850.98,2681.87) 5161.53,2629.35 ; 4850.98,2366.91 ccw(c4850.98,2681.87) 5161.53,2629.35 ; 4850.98,2366.91 4374.61,2365 4850.98,2366.91 ; 4916.93,2808.52 ccw(c5050,2808.52) 5050,2675.45 ; 4916.93,2808.52 ccw(c5050,2808.52) 5050,2675.45 ; 4916.93,2808.52 4916.93,3742.38 ; 4916.93,2808.52 4916.93,3742.38 ; 4916.93,3742.38 cw(c5050,3742.38) 5050,3875.45 ; 4916.93,3742.38 cw(c5050,3742.38) 5050,3875.45 ; 4990,4320.45 cw(c4990,4145.45) 5165,4145.45 ; 4990,4320.45 cw(c4990,4145.45) 5165,4145.45 ; 5050,2675.45 5120.86,2675.45 5050,2675.45 ; 5050,3875.45 5125,3875.45 ; 5050,3875.45 5125,3875.45 ; 5125,3875.45 ccw(c5125,3916.49) 5166.04,3916.49 ; 5125,3875.45 ccw(c5125,3916.49) 5166.04,3916.49 ; 5161.53,2629.35 ccw(c5118.26,2632.4) 5120.24,2675.73 cw(c5118.26,2632.4) 5161.53,2629.35 ; 5165,4145.45 5166.03,3916.49 ; 5165,4145.45 5166.03,3916.49 ; 2410.05,3601.43 ccw(c2446.02,3601.43) 2446.02,3565.45 cw(c2446.02,3601.43) 2410.05,3601.43 ; 2446.2,3565.45 2525,3565.45 2446.2,3565.45 ; 2526.01,3565.42 cw(c2522.5,3432.97) 2655,3432.97 ccw(c2522.5,3432.97) 2526.01,3565.42 ; 4331.07,2405.98 ccw(c4372.11,2405.98) 4372.11,2364.95 cw(c4372.11,2405.98) 4331.07,2405.98 ; 4331.1,2405.95 4331.1,2475.45 4331.1,2405.95

## Silkscreen, mask and mechanical layers (free items; w line width, h text height)
Bottom Overlay:
  lines w10: 2915,2920.45 2915,3100.45 3735,3100.45 3735,2920.45 2915,2920.45

## Text inside footprints (layer, text, board x,y; h text height)
.1: Bottom Overlay "5V" at 2980.51,3181.55 h31.5 r90; Bottom Overlay "USB_DM" at 3065.26,3306.55 h31.5 r90; Bottom Overlay "USB_DP" at 3150.26,3306.55 h31.5 r90; Bottom Overlay "GND" at 3225.51,3211.55 h31.5 r90; Bottom Overlay "UART3_TX" at 3305.26,3366.55 h31.5 r90; Bottom Overlay "UART3_RX" at 3380.26,3366.55 h31.5 r90; Bottom Overlay "GPIO2_IO12" at 3460.26,3411.55 h31.5 r90; Bottom Overlay "I2C2_SCL" at 3540.26,3356.55 h31.5 r90; Bottom Overlay "I2C2_SDA" at 3625.26,3356.55 h31.5 r90; Bottom Overlay "3v3" at 3700.51,3206.55 h31.5 r90; Bottom Overlay "ADC1" at 2974,2899 h25 r90; Bottom Overlay "ADC2" at 3054,2899 h25 r90; Bottom Overlay "PWM1" at 3134,2899 h25 r90; Bottom Overlay "DBG_TX" at 3214.83,2899 h25 r90; Bottom Overlay "DBG_RX" at 3294.83,2899 h25 r90; Bottom Overlay "GPIO2_IO15" at 3374.83,2899 h25 r90; Bottom Overlay "GPIO2_IO16" at 3454.83,2899 h25 r90; Bottom Overlay "GPIO2_IO17" at 3539.83,2899 h25 r90; Bottom Overlay "GPIO2_IO18" at 3614.83,2899 h25 r90; Bottom Overlay "GPIO4_IO28" at 3694.83,2899 h25 r90; Bottom Overlay "GPIO1_IO13" at 3917.83,2886.55 h25 r90; Bottom Overlay "ESPI2_MOSI" at 3997.83,2886.55 h25 r90; Bottom Overlay "ESPI2_MISO" at 4072.83,2886.55 h25 r90; Bottom Overlay "ESPI2_SCLK" at 4157.83,2887 h25 r90; Bottom Overlay "ESPI2_SS0" at 4237.83,2886.55 h25 r90; Bottom Overlay "GPIO2_IO14" at 4322.83,2887 h25 r90; Bottom Overlay "GPIO2_IO13" at 4402.83,2887 h25 r90; Bottom Overlay "PWM2" at 4482,2882 h25 r90; Bottom Overlay "ADC3" at 4557,2887 h25 r90; Bottom Overlay "ADC4" at 4639,2889 h25 r90; Bottom Overlay "3v3" at 3907.5,3208.94 h31.5 r90; Bottom Overlay "I2C4_SDA" at 3986.75,3361.55 h31.5 r90; Bottom Overlay "I2C4_SCL" at 4066.75,3356.55 h31.5 r90; Bottom Overlay "GPIO2_IO12" at 4141.75,3411.55 h31.5 r90; Bottom Overlay "UART4_RX" at 4222.5,3363.94 h31.5 r90; Bottom Overlay "5V" at 4637.5,3178.94 h31.5 r90; Bottom Overlay "SOM_RST" at 4547.5,3338.94 h31.5 r90; Bottom Overlay "RTC" at 4467.5,3208.94 h31.5 r90; Bottom Overlay "GND" at 4387.5,3208.94 h31.5 r90; Bottom Overlay "UART4_TX" at 4307.5,3368.94 h31.5 r90
U1: Mechanical 13 "*" at 3242,3848 h50 r180
U8: Mechanical 13 "*" at 3380.16,3563 h50 r90